# Altium PCB AI_Thinker.PcbDoc
Units mm, origin at the board's own origin, x right, y up, seen from the top; angles counter-clockwise.
Board outline 25.78 x 41.4 mm, 2 copper layers (Top Layer, Bottom Layer); 12 components, 45 nets, 113 pads, 42 vias.
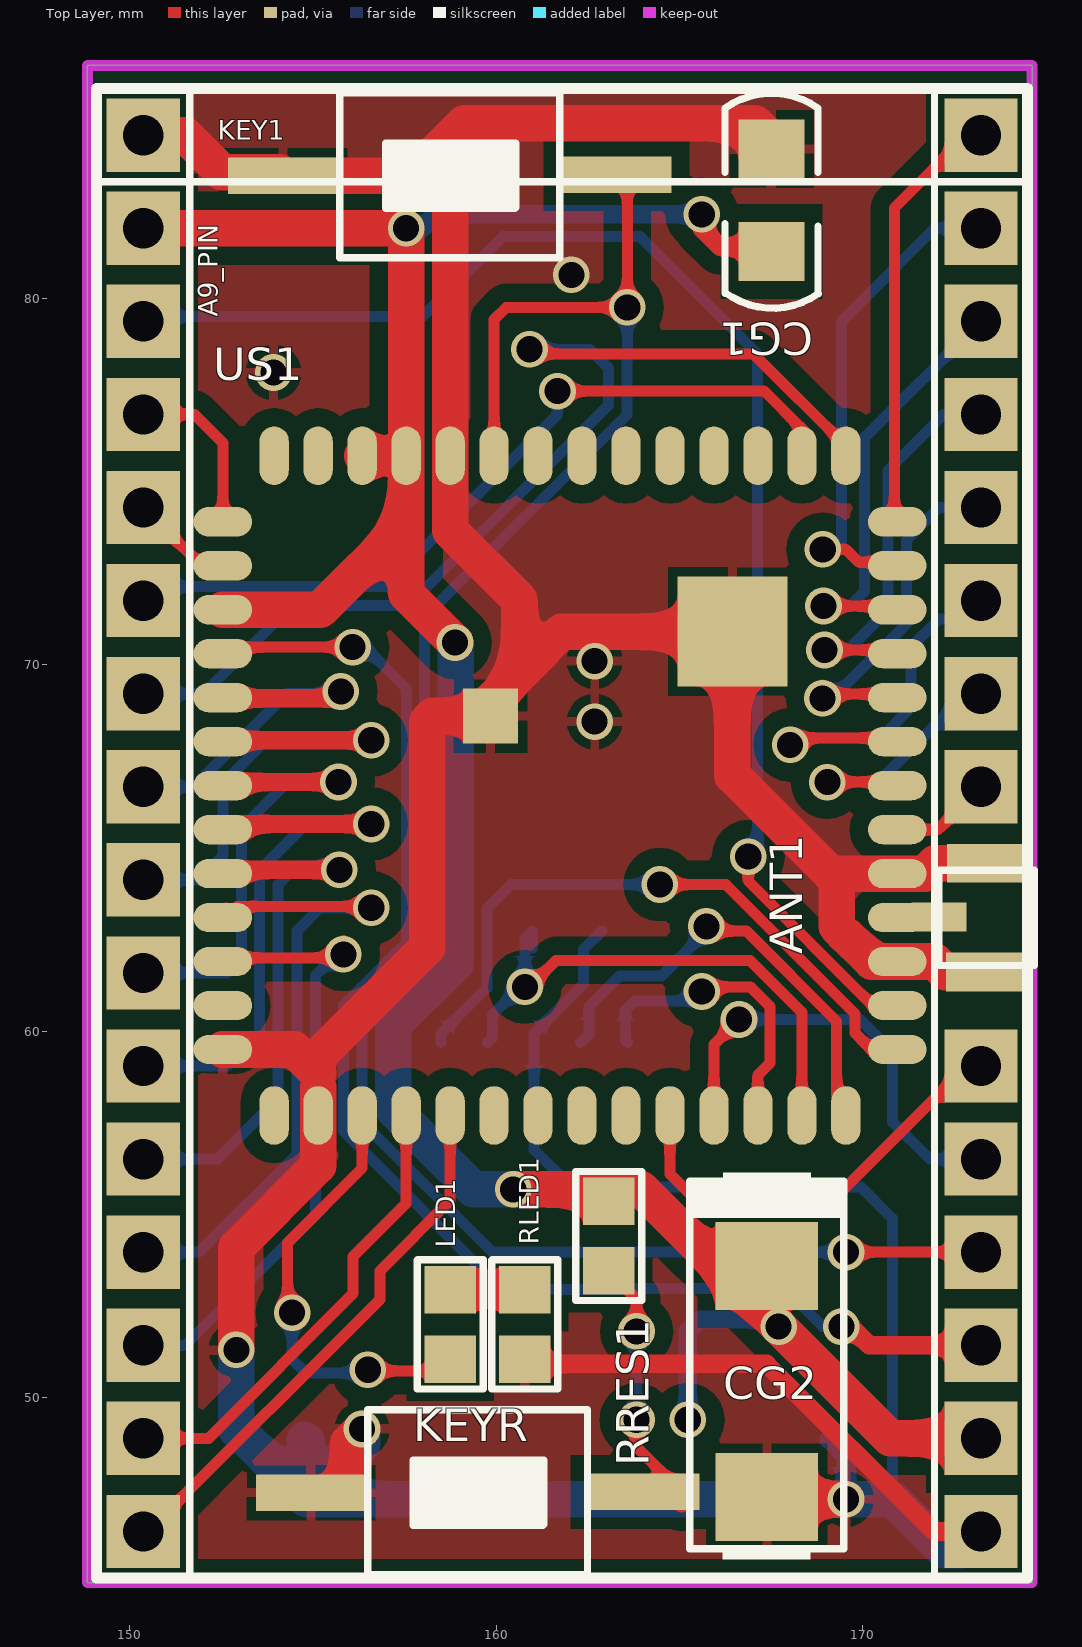
[diagram p0: Top Layer view]
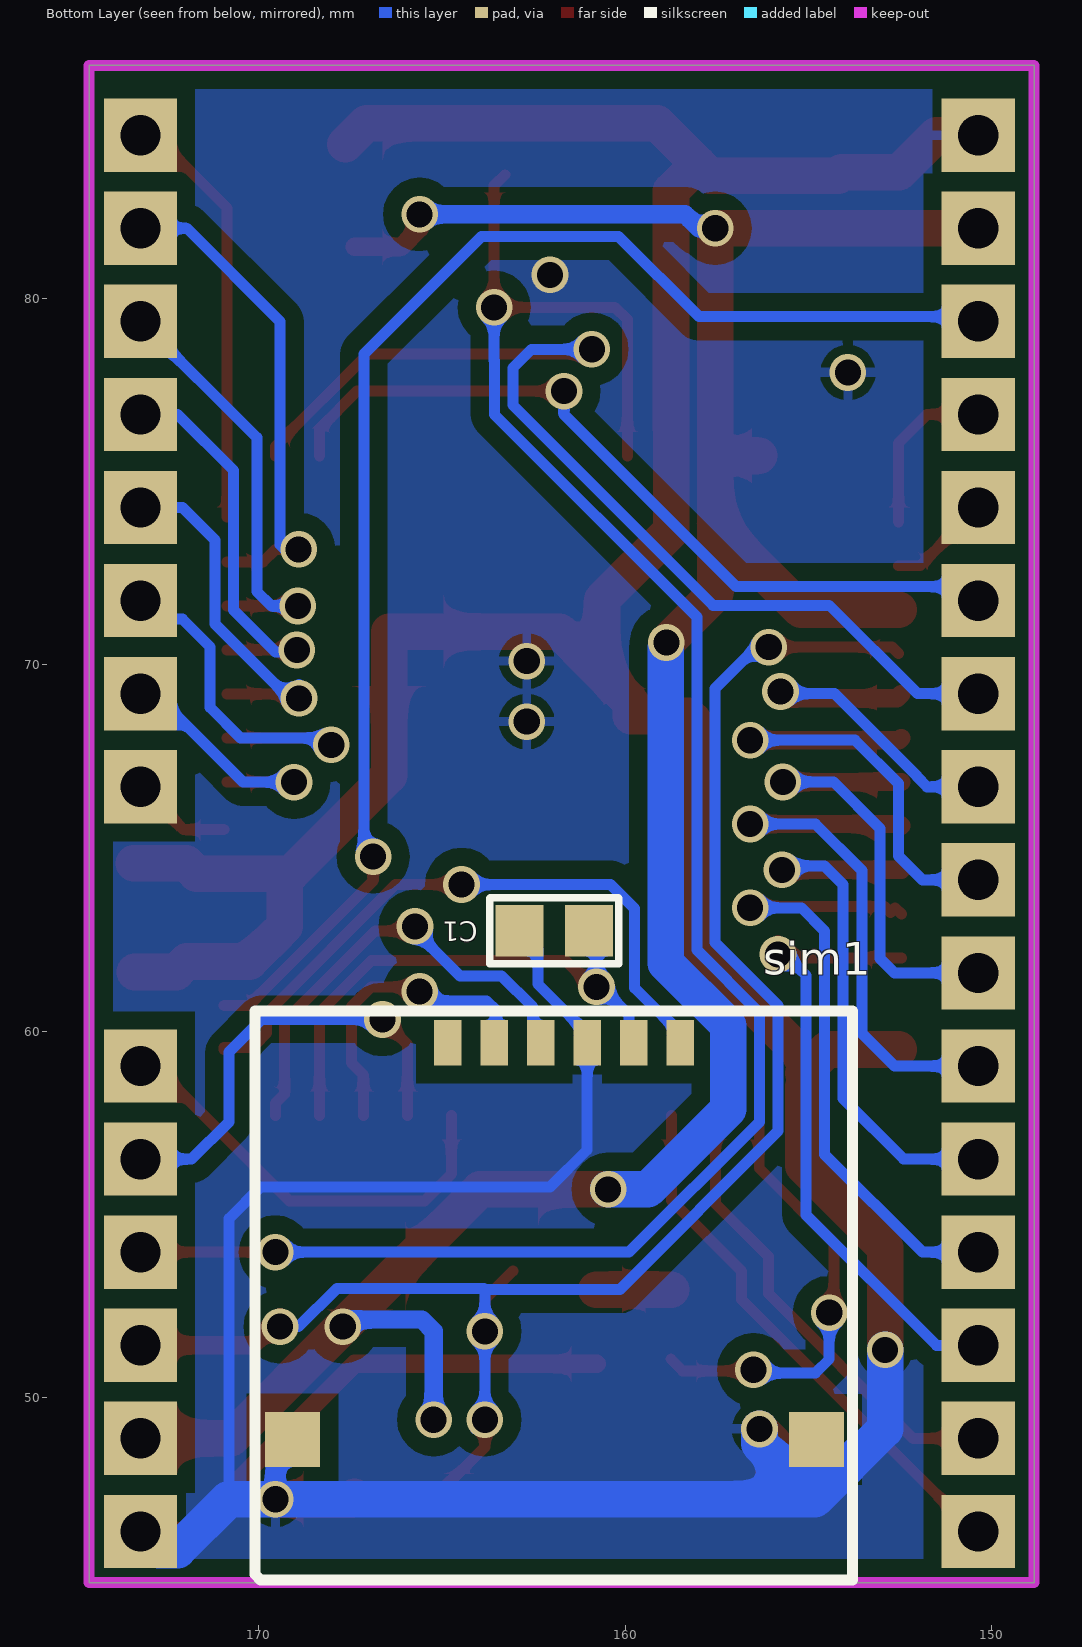
[diagram p1: Bottom Layer view, seen from below]

## Layer stack, top to bottom
Top Solder: solder mask 0.0102, Solder Resist, Dk 3.5
Top Layer: signal copper 0.0356
Dielectric 1: dielectric 0.32, FR-4, Dk 4.8
Bottom Layer: signal copper 0.0356
Bottom Solder: solder mask 0.0102, Solder Resist, Dk 3.5

## Board outline
148.844,44.958 148.844,86.36 174.625,86.36 174.625,44.958

## Design rules (kind name [scope] priority, off if disabled: settings)
Clearance [All] p1: gap=0.2 ignorepadtopadclearanceinfootprint=FALSE except(0.5: Arc-Poly Track-Poly SMDPad-Poly THPad-Poly Via-Poly Fill-Poly Poly-Poly)
ComponentClearance [All] p1: gap=0.01 collisioncheckmode=3 verticalgap=0.01 showdistances=FALSE
PolygonConnect [All] p1: connectstyle=Relief reliefconductorwidth=0.254 reliefentries=4 polygonreliefangle="90 Angle" airgapwidth=0.254
RoutingVias [All] p1: holewidth=0.711 width=1.27 viastyle="Through Hole" minholewidth=0.711 minwidth=1.27 maxholewidth=0.711 maxwidth=1.27
SolderMaskExpansion [All] p1: expansion=0.102
Width [All] p1: maxlimit=10 minlimit=0.254 preferedwidth=0.254 minimp=50.000000 maximp=50.000000 favimp=50.000000
29 further rules are at their usual default settings.

## Components (designator, comment, footprint, x,y, rotation, side; value= is the part's Value field where it differs from the comment)
A9_PIN "A9_module" A9_MODULE 150.368,69.19 r0 top locked
ANT1 "ANT_UFL" UFL_CON 173.533,63.195 r90 top
C1 "100nf,50v" 0805. 161.925,62.738 r0 bottom
CG1 "1uF" "CAP_SMD [1206]" 167.513,84.077 r270 top
CG2 "10u" MY_SMC_D 167.386,50.444 r270 top locked
KEY1 "KEY" SMD_KEY 158.75,83.185 r180 top
KEYR "KEY" SMD_KEY 159.512,47.244 r180 top
LED1 "BLUE,0805-SMD" 0805. 158.754,52.015 r270 top
RLED1 "470R,10%,0.1w" 0805. 160.786,52.015 r270 top
RRES1 "470R,10%,0.1w" 0805. 163.072,54.428 r270 top
sim1 "simcard" SIMCARD_M 158.496,59.69 r0 bottom locked
US1 "A9" A9 169.542,76.106 r270 top locked

## Footprints (in the part's own frame and the unit in brackets; to place one, negate y for a bottom-side part, rotate by r counter-clockwise, add the part's x,y. Pads: shape width x height; smd on the part's side, far side on the other; paste and mask are expansions set on the pad)
0805. [mm]
  rect 1.3x1.4 smd: 1(-0.939,-0.004) 2(0.961,-0.004)
  silkscreen extent -1.75,-0.9 1.77,0.9
A9 [mm]
  oval 1.6x0.8 smd: 1(0.4,0) 2(0.4,-1.2) 3(0.4,-2.4) 4(0.4,-3.6) 5(0.4,-4.8) 6(0.4,-6) 7(0.4,-7.2) 8(0.4,-8.4) 9(0.4,-9.6) 10(0.4,-10.8) 11(0.4,-12) 12(0.4,-13.2) 13(0.4,-14.4) 14(0.4,-15.6) 28(18.4,-15.6) 29(18.4,-14.4) 30(18.4,-13.2) 31(18.4,-12) 32(18.4,-10.8) 33(18.4,-9.6) 34(18.4,-8.4) 35(18.4,-7.2) 36(18.4,-6) 37(18.4,-4.8) 38(18.4,-3.6) 39(18.4,-2.4) 40(18.4,-1.2) 41(18.4,0)
  oval 0.8x1.6 smd: 15(2.2,-17) 16(3.4,-17) 17(4.6,-17) 18(5.8,-17) 19(7,-17) 20(8.2,-17) 21(9.4,-17) 22(10.6,-17) 23(11.8,-17) 24(13,-17) 25(14.2,-17) 26(15.4,-17) 27(16.6,-17) 42(16.6,1.4) 43(15.4,1.4) 44(14.2,1.4) 45(13,1.4) 46(11.8,1.4) 47(10.6,1.4) 48(9.4,1.4) 49(8.2,1.4) 50(7,1.4) 51(5.8,1.4) 52(4.6,1.4) 53(3.4,1.4) 54(2.2,1.4)
  rect 3x3 smd: 55(5.2,-3.1)
  rect 1.5x1.5 smd: 56(7.5,-9.7)
  body extent 0,-17.4 18.8,1.8, height 1.8
A9_MODULE [mm]
  rect 2x2 hole 1.1: 1(0,15.265) 2(0,12.725) 3(0,10.185) 4(0,7.645) 5(0,5.105) 6(0,2.565) 7(0,0.025) 8(0,-2.515) 9(0,-5.055) 10(0,-7.595) 11(0,-10.135) 12(0,-12.675) 13(0,-15.215) 14(0,-17.755) 15(0,-20.295) 16(0,-22.835) 17(22.86,-22.835) 18(22.86,-20.295) 19(22.86,-17.755) 20(22.86,-15.215) 21(22.86,-12.675) 22(22.86,-10.135) 23(22.86,-2.515) 24(22.86,0.025) 25(22.86,2.565) 26(22.86,5.105) 27(22.86,7.645) 28(22.86,10.185) 29(22.86,12.725) 30(22.86,15.265)
  silkscreen extent -1.27,-24.1 24.13,16.54
"CAP_SMD [1206]" [mm]
  rect 1.6x1.8 smd: 1(-0.003,0) 2(2.797,0)
  silkscreen extent -1.52,-1.27 4.34,1.28
MY_SMC_D [mm]
  rect 2.4x2.8 smd: +(-3.15,0) -(3.15,0)
  silkscreen extent -5.71,-2.11 4.85,2.1, body extent -3.65,-2.15 3.65,2.15, height 2.83
SIMCARD_M [mm]
  rect 0.75x1.25 smd: 1(1.27,0) 2(0,0) 3(3.81,0) 4(2.54,0) 5(6.35,0) 6(5.08,0)
  rect 1.5x1.5 smd: 7(-3.72,10.83) 7(10.58,10.83)
  silkscreen extent -4.7,-0.86 11.61,14.66
SMD_KEY [mm]
  rect 3x1 smd: 1(-4.529,-0.191) 2(4.564,-0.165)
  silkscreen extent -2.98,-2.43 3.02,2.07
UFL_CON [mil]
  rect 41.5x86.61 smd: 1(-62,6) 1(55,5)
  rect 31.5x59.05 smd: 2(-3,57)
  silkscreen extent -55,-45 47,57

## Part data
C1: library part Cap, "Capacitor", LatestRevisionDate=17-Jul-2002, LatestRevisionNote="Re-released for DXP Platform.", PackageReference=RAD-0.3, Published=8-Jun-2000, Publisher="Altium Limited"
CG1: library part "Cap_smd [1206]", "Capacitor", Package=[1206], Package Type=smd, Device Type=CAPACITOR, part number=Capacitor, Revision="July-2002: Re-released for DXP Platform."
CG2: library part "Cap Pol", "Polar capacitor", ASiD Part Number=C-AS, Volte=35v
LED1: library part LED0, "Typical INFRARED GaAs LED", LatestRevisionDate=08-Jul-2005, LatestRevisionNote="Mech Layer 1 removed.", PackageReference=LED-0, Published=8-Jun-2000, Publisher="Altium Limited"
RLED1 RRES1: library part Res2, "Resistor", LatestRevisionDate=17-Jul-2002, LatestRevisionNote="Re-released for DXP Platform.", PackageReference=AXIAL-0.4, Published=8-Jun-2000, Publisher="Altium Limited"

## Via types
v1: diameter 1, hole 0.711, Top Layer to Bottom Layer, 42 vias

## Nets (pads, with @x,y where several pads share a name; then routed paths per layer and width w, separated by ;. In a path a pad name is that pad's centre, name@x,y a point inside that pad or via, vN(x,y) a via of type N, cw(c..) or ccw(c..) an arc to the next point about the centre after c; other vN are vias at no path point)
ADC0: A9_PIN.4 US1.15 | length 4.6
  Top Layer w0.3: A9_PIN.4 151.765,76.835 152.542,76.058 US1.15
ADC1: A9_PIN.5 US1.16 | length 2.8
  Top Layer w0.3: A9_PIN.5 151.957,72.706 US1.16
GPS_RF: US1.28
GSM_RF: ANT1.2 US1.45
HST_RXD: A9_PIN.21 US1.38 | length 12.2
  Top Layer w0.3: US1.38 165.942,59.643 v1(166.624,60.325)
  Bottom Layer w0.3: v1(166.624,60.325) 169.926,60.325 170.815,59.436 170.815,57.531 171.831,56.515 A9_PIN.21
HST_TXD: A9_PIN.22 US1.37 | length 12.2
  Top Layer w0.3: US1.37 164.742,56.111 165.481,55.372 169.164,55.372 172.72,58.928 172.593,58.928 172.72,59.055 A9_PIN.22
IO/0: A9_PIN.29 US1.53 | length 13.6
  Top Layer w0.3: v1(168.91,73.152) 169.545,73.152 169.89,72.807 US1.53@170.866,72.807
  Bottom Layer w0.3: v1(168.91,73.152) 169.291,73.152 169.418,73.279 169.418,79.375 171.958,81.915 A9_PIN.29
IO/1: A9_PIN.30 US1.54 | length 11.4
  Top Layer w0.3: US1.54@170.866,74.041 170.866,82.474 A9_PIN.30@172.974,84.582
IO/2: A9_PIN.28 US1.52 | length 11.9
  Top Layer w0.3: v1@168.91,71.628 v1(168.931,71.607) US1.52@170.866,71.607
  Bottom Layer w0.3: v1(168.931,71.607) 169.651,71.607 170.053,72.009 170.053,76.2 A9_PIN.28
IO/3: A9_PIN.27 US1.51 | length 11.2
  Top Layer w0.3: v1@168.91,70.358 v1(168.959,70.407) US1.51@170.866,70.407
  Bottom Layer w0.3: v1@168.959,70.534 169.135,70.358 169.545,70.358 170.688,71.501 170.688,75.311 172.212,76.835 A9_PIN.27
IO/4: A9_PIN.25 US1.49 | length 11.5
  Top Layer w0.3: v1@167.894,67.564 168.337,68.007 US1.49@170.866,68.007
  Bottom Layer w0.3: v1@168.021,67.691 168.337,68.007 170.496,68.007 171.323,68.834 171.323,70.485 172.085,71.247 173.101,71.247 173.228,71.12 A9_PIN.25
  other v1: 168.021,67.818
IO/5: A9_PIN.26 US1.50 | length 10.2
  Top Layer w0.3: v1(168.902,69.088) 169.021,69.088 168.902,69.207 US1.50@170.866,69.207
  Bottom Layer w0.3: v1@168.902,69.461 169.219,69.143 171.196,71.12 171.196,73.406 172.085,74.295 A9_PIN.26
IO/6: A9_PIN.24 US1.48 | length 7.1
  Top Layer w0.3: v1(169.037,66.802) 169.042,66.807 US1.48@170.866,66.807
  Bottom Layer w0.3: v1@169.037,66.548 169.291,66.802 170.434,66.802 172.847,69.215 A9_PIN.24
IO/7: A9_PIN.23 US1.47 | length 2.8
  Top Layer w0.3: US1.47 172.059,65.506 A9_PIN.23
IO/8: US1.8
IO/9: US1.7
IO/10: US1.6
IO/11: US1.5
IO/12: US1.4
IO/13: US1.3
IO/14: A9_PIN.9 US1.20 | length 13.2
  Top Layer w0.5: US1.20@152.466,68.007 152.528,67.945 v1(156.591,67.945)
  Bottom Layer w0.3: A9_PIN.9 151.892,64.135 152.543,64.786 152.543,66.763 153.725,67.945 v1(156.591,67.945) v1@156.718,67.945
IO/15: A9_PIN.8 US1.19 | length 10.2
  Top Layer w0.5: US1.19@152.466,69.207 152.585,69.088 155.575,69.088 v1(155.761,69.274) v1@155.829,69.342
  Bottom Layer w0.3: A9_PIN.8 151.765,66.675 152.043,66.953 152.043,66.97 154.288,69.215 v1@155.956,69.215
IO/16: A9_PIN.12 US1.23 | length 15.6
  Top Layer w0.5: US1.23@152.466,64.407 v1(155.72,64.407) v1@155.829,64.516
  Bottom Layer w0.3: A9_PIN.12 152.4,56.515 154.051,58.166 154.051,64.008 154.559,64.516 v1@155.829,64.516
IO/17: A9_PIN.10 US1.21 | length 12.8
  Top Layer w0.5: US1.21@152.466,66.807 v1(155.697,66.807)
  Bottom Layer w0.3: A9_PIN.10 152.654,61.595 153.043,61.984 153.043,65.54 154.31,66.807 v1(155.697,66.807)
IO/18: A9_PIN.11 US1.22 | length 15.8
  Top Layer w0.5: US1.22@152.466,65.607 152.518,65.659 v1(156.591,65.659)
  Bottom Layer w0.3: A9_PIN.11 152.654,59.055 153.543,59.944 153.543,64.389 154.813,65.659 v1(156.591,65.659) v1@156.718,65.659
IO/19: A9_PIN.7 US1.1 | length 29.8
  Top Layer w0.3: v1(160.909,78.613) 160.782,78.613 160.655,78.486 167.023,78.486 169.542,75.967 US1.1
  Bottom Layer w0.3: A9_PIN.7 152.019,69.215 154.432,71.628 157.607,71.628 163.068,77.089 163.068,78.105 162.56,78.613 v1(160.909,78.613)
IO/20: A9_PIN.6 US1.2 | length 21.9
  Top Layer w0.3: v1(161.671,77.47) 167.314,77.47 168.342,76.442 US1.2
  Bottom Layer w0.3: A9_PIN.6 150.749,72.136 156.972,72.136 161.671,76.835 v1(161.671,77.47)
IO/25: A9_PIN.16 US1.32 | length 15.2
  Top Layer w0.3: A9_PIN.16 150.368,46.736 150.495,46.609 150.749,46.609 156.829,52.689 156.829,53.467 158.742,55.38 US1.32
IO/26: A9_PIN.14 US1.25 | length 17.6
  Top Layer w0.3: US1.25@152.466,62.007 155.733,62.007 v1(155.829,62.103) v1@155.829,62.484
  Bottom Layer w0.3: A9_PIN.14 151.511,51.435 155.067,54.991 155.067,61.531 v1@155.829,62.293
IO/27: US1.26
IO/28: LED1.2 US1.30 | length 12.3
  Top Layer w0.3: v1@154.305,52.324 154.305,54.229 156.342,56.266 US1.30 ; v1(156.497,50.767) 156.53,50.734 158.43,50.734 LED1.2
  Bottom Layer w0.3: v1(154.432,52.324) 154.432,51.054 154.813,50.673 v1@156.718,50.673
IO/29: A9_PIN.13 US1.24 | length 18.3
  Top Layer w0.3: US1.24@152.466,63.207 152.632,63.373 152.759,63.246 152.925,63.412 156.679,63.412 v1@156.718,63.373
  Bottom Layer w0.3: A9_PIN.13 151.892,53.975 154.559,56.642 154.559,62.738 155.194,63.373 v1(156.591,63.373) v1@156.718,63.373
IO/30: A9_PIN.15 US1.31 | length 12.8
  Top Layer w0.3: A9_PIN.15 152.146,48.895 156.093,52.842 156.093,53.856 157.542,55.305 US1.31
NetLED1_1: LED1.1 RLED1.1 | length 2
  Top Layer w1: LED1.1 RLED1.1
PWR_K: A9_PIN.20 KEY1.1 US1.9 | length 54.8
  Top Layer w0.3: US1.9 159.942,79.424 160.274,79.756 v1(163.576,79.756) 163.576,83.078 KEY1.1 ; v1(169.545,53.975) A9_PIN.20
  Bottom Layer w0.3: v1(163.576,79.756) 163.576,78.304 163.568,78.312 163.568,76.827 158.046,71.305 158.046,62.216 156.337,60.507 156.337,57.531 159.893,53.975 v1(169.545,53.975)
RST: A9_PIN.19 KEYR.1 RRES1.2 US1.18 | length 47.2
  Top Layer w0.3: US1.18 152.721,70.485 v1(156.083,70.485) ; RRES1.2 163.83,52.705 v1(163.83,51.816) ; v1(163.83,49.403) 163.83,48.661 KEYR.1@165.057,47.434
  Top Layer w0.5: KEYR.1@165.057,47.117 KEYR.1@165.057,47.434 ; v1(169.418,51.943) 169.418,52.197 170.18,51.435 A9_PIN.19
  Bottom Layer w0.3: v1(156.083,70.485) 156.417,70.485 157.546,69.356 157.546,62.423 155.829,60.706 155.829,57.277 160.147,52.959 163.83,52.959 ; v1@164.084,49.149 v1(163.83,49.403) v1(163.83,51.816) 163.83,52.959 ; v1(169.418,51.943) 168.91,51.943 167.865,52.988 163.859,52.988 163.83,52.959
SIM_GND: A9_PIN.1 A9_PIN.17 ANT1.1 C1.2 CG1.1 CG2.- KEY1.2 KEYR.2 RLED1.2 sim1.4 US1.10 US1.27 US1.29 US1.44 US1.46 US1.55 US1.56 | length 156.3
  Top Layer w0.5: RLED1.2@160.778,50.927 167.38,50.927 171.952,46.355 A9_PIN.17
  Top Layer w1: A9_PIN.1 151.511,84.455 152.527,83.439 154.097,83.439 KEY1.2 157.696,83.35 158.013,83.668 ; US1.27 154.489,59.506 154.913,59.082 154.946,59.049 ; v1(152.908,51.308) 152.908,54.102 155.142,56.336 US1.29 US1.29@155.142,58.495 ; 155.142,58.853 154.946,59.049 ; KEYR.2@155.964,47.409 155.964,48.776 v1(156.337,49.149) ; 158.742,76.581 US1.10 158.742,73.668 160.629,71.781 160.629,69.748 ; US1.10@158.75,76.444 158.75,82.931 158.013,83.668 ; CG2.- 167.447,47.233 v1(169.545,47.233) ; CG1.1@167.64,84.204 167.059,84.785 159.131,84.785 158.013,83.668 ; ANT1.1@173.38,61.62 172.254,61.62 171.968,61.906 US1.44 170.25,61.906 169.291,62.865 169.291,64.306 ; ANT1.1@173.406,64.592 171.984,64.592 171.698,64.306 US1.46 169.291,64.306 ; 154.946,59.049 155.194,59.296 155.194,59.364 158.115,62.285 158.115,68.453 158.268,68.606 US1.56 159.842,68.961 160.629,69.748 ; 160.629,69.748 161.787,70.906 US1.55 166.442,66.984 169.12,64.306 169.291,64.306
  Bottom Layer w0.3: C1.2 162.386,62.242 162.386,61.29 161.036,59.94 sim1.4 161.036,56.769 162.052,55.753 169.164,55.753 169.95,55.753 170.815,54.888 170.815,47.498
  Bottom Layer w0.5: 169.076,48.86 169.545,48.391 v1(169.545,47.233)
  Bottom Layer w1: v1(152.908,51.308) 152.908,49.149 154.824,47.233 ; 154.776,48.86 154.824,48.812 154.824,47.233 ; v1(156.337,49.149) 156.337,48.746 154.824,47.233 ; A9_PIN.17 172.72,45.847 172.211,45.847 170.825,47.233 v1(169.545,47.233) 154.824,47.233
  other v1: 162.687,68.453 162.687,70.104 153.924,77.978 162.052,80.645
SIMCLK: sim1.3 US1.41 | length 12.4
  Top Layer w0.3: v1@165.862,62.738 166.827,62.738 169.292,60.273 169.292,58.292 169.542,58.042 US1.41
  Bottom Layer w0.3: sim1.3 162.531,59.915 162.531,60.677 163.37,61.516 164.513,61.516 165.735,62.738 v1(165.735,62.865)
SIMDATA: sim1.6 US1.39 | length 8.5
  Top Layer w0.3: v1@165.481,61.214 166.937,61.214 167.474,60.677 167.474,59.143 167.142,58.811 US1.39
  Bottom Layer w0.3: sim1.6 163.529,59.737 163.529,60.579 163.783,60.833 165.354,60.833 v1(165.608,61.087)
SIMRST: sim1.2 US1.42 | length 17.9
  Top Layer w0.3: v1(164.465,64.008) 166.264,64.008 169.792,60.48 169.792,59.951 170.18,59.563 170.942,59.563 US1.42
  Bottom Layer w0.3: sim1.2 158.496,59.94 159.746,61.19 159.746,63.353 160.401,64.008 v1(164.465,64.008)
SIMVCC: C1.1 sim1.1 US1.40 | length 15
  Top Layer w0.3: v1@161.036,61.341 161.632,61.937 166.921,61.937 168.342,60.516 US1.40
  Bottom Layer w0.3: sim1.1 159.893,59.817 159.893,60.452 160.655,61.214 v1(160.782,61.214) 160.782,62.538 C1.1 C1.1@160.986,62.28
SPK_N: US1.14
SPK_P: US1.13
VBAT: A9_PIN.2 A9_PIN.18 CG1.2 CG2.+ RRES1.1 US1.11 US1.12 US1.17 | length 75
  Top Layer w0.5: v1(165.608,82.296) 165.608,81.909 166.11,81.407 CG1.2@167.386,81.407
  Top Layer w1: A9_PIN.2 v1(157.542,81.915) US1.11 ; US1.17 155.199,71.506 157.542,73.849 ; US1.12 US1.11 ; v1(158.877,70.612) 157.542,71.947 157.542,73.849 ; v1(160.464,55.689) 163.961,55.689 v1(167.708,51.943) 170.756,48.895 A9_PIN.18 ; 157.542,73.849 US1.11
  Bottom Layer w0.5: v1(157.542,81.915) 157.988,81.915 158.369,82.296 v1(165.608,82.296) ; v1(165.227,49.403) 165.227,51.816 165.549,52.138 167.513,52.138 v1(167.708,51.943)
  Bottom Layer w1: v1@158.896,70.485 158.896,61.864 157.187,60.155 157.187,57.883 159.381,55.689 v1(160.464,55.689)
VO: A9_PIN.3 US1.43 | length 39.1
  Top Layer w0.3: v1@166.878,64.897 v1(166.878,64.77) 166.878,64.101 170.273,60.706 US1.43
  Bottom Layer w0.3: A9_PIN.3 150.495,79.502 157.988,79.502 160.182,81.696 163.922,81.696 167.132,78.486 167.132,65.151 166.878,64.897 v1(166.878,64.77)
pads on no net: sim1.5 sim1.7 US1.33 US1.34 US1.35 US1.36

## Polygon pours and split planes (outlines as drawn)
no net on Bottom Overlay (solid, remove dead copper): 148.844,44.958
SIM_GND on Top Layer "Top Layer-SIM_GND" (solid, remove dead copper, pour order 4): 148.844,86.36 174.498,86.36 174.625,86.233 174.625,45.085 148.971,45.085 148.844,44.958
no net on Top Layer "Top Layer-No Net" (solid, remove dead copper, pour order 0): 148.844,86.233
SIM_GND on Bottom Layer "Bottom Layer-SIM_GND" (solid, remove dead copper, pour order 2): 148.846,86.085 174.627,86.085 174.627,44.683 174.5,44.81 148.846,44.81

## Keep-outs
Keep-Out Layer:
  the board outline again, w0.3